# Altium PCB pcb.PcbDoc
Units mil, origin at the board's own origin, x right, y up, seen from the top; angles counter-clockwise.
Board outline 1377.95 x 1377.95 mil, 2 copper layers (Top Layer, Bottom Layer); 19 components, 13 nets, 50 pads, 35 vias.
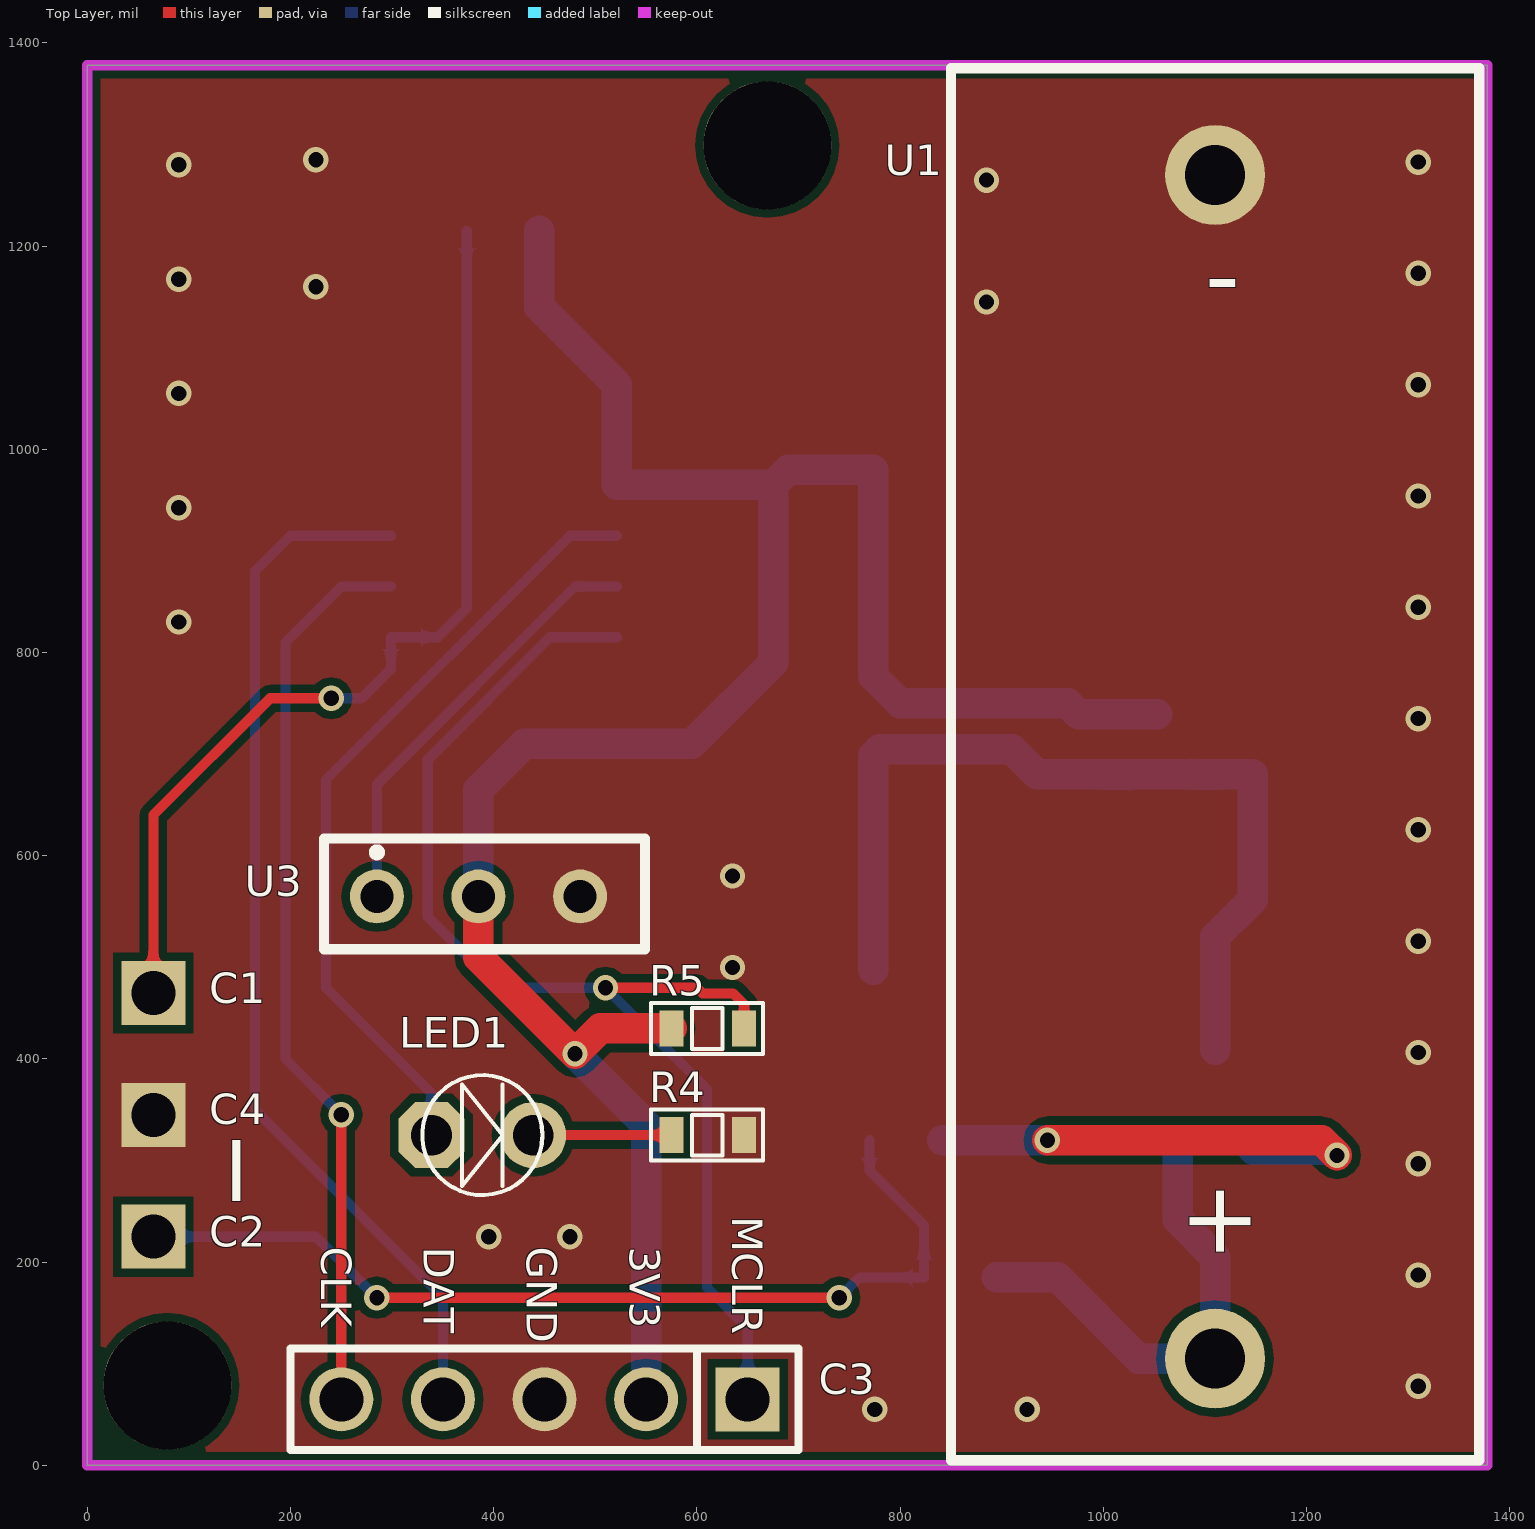
[diagram p0: Top Layer view]
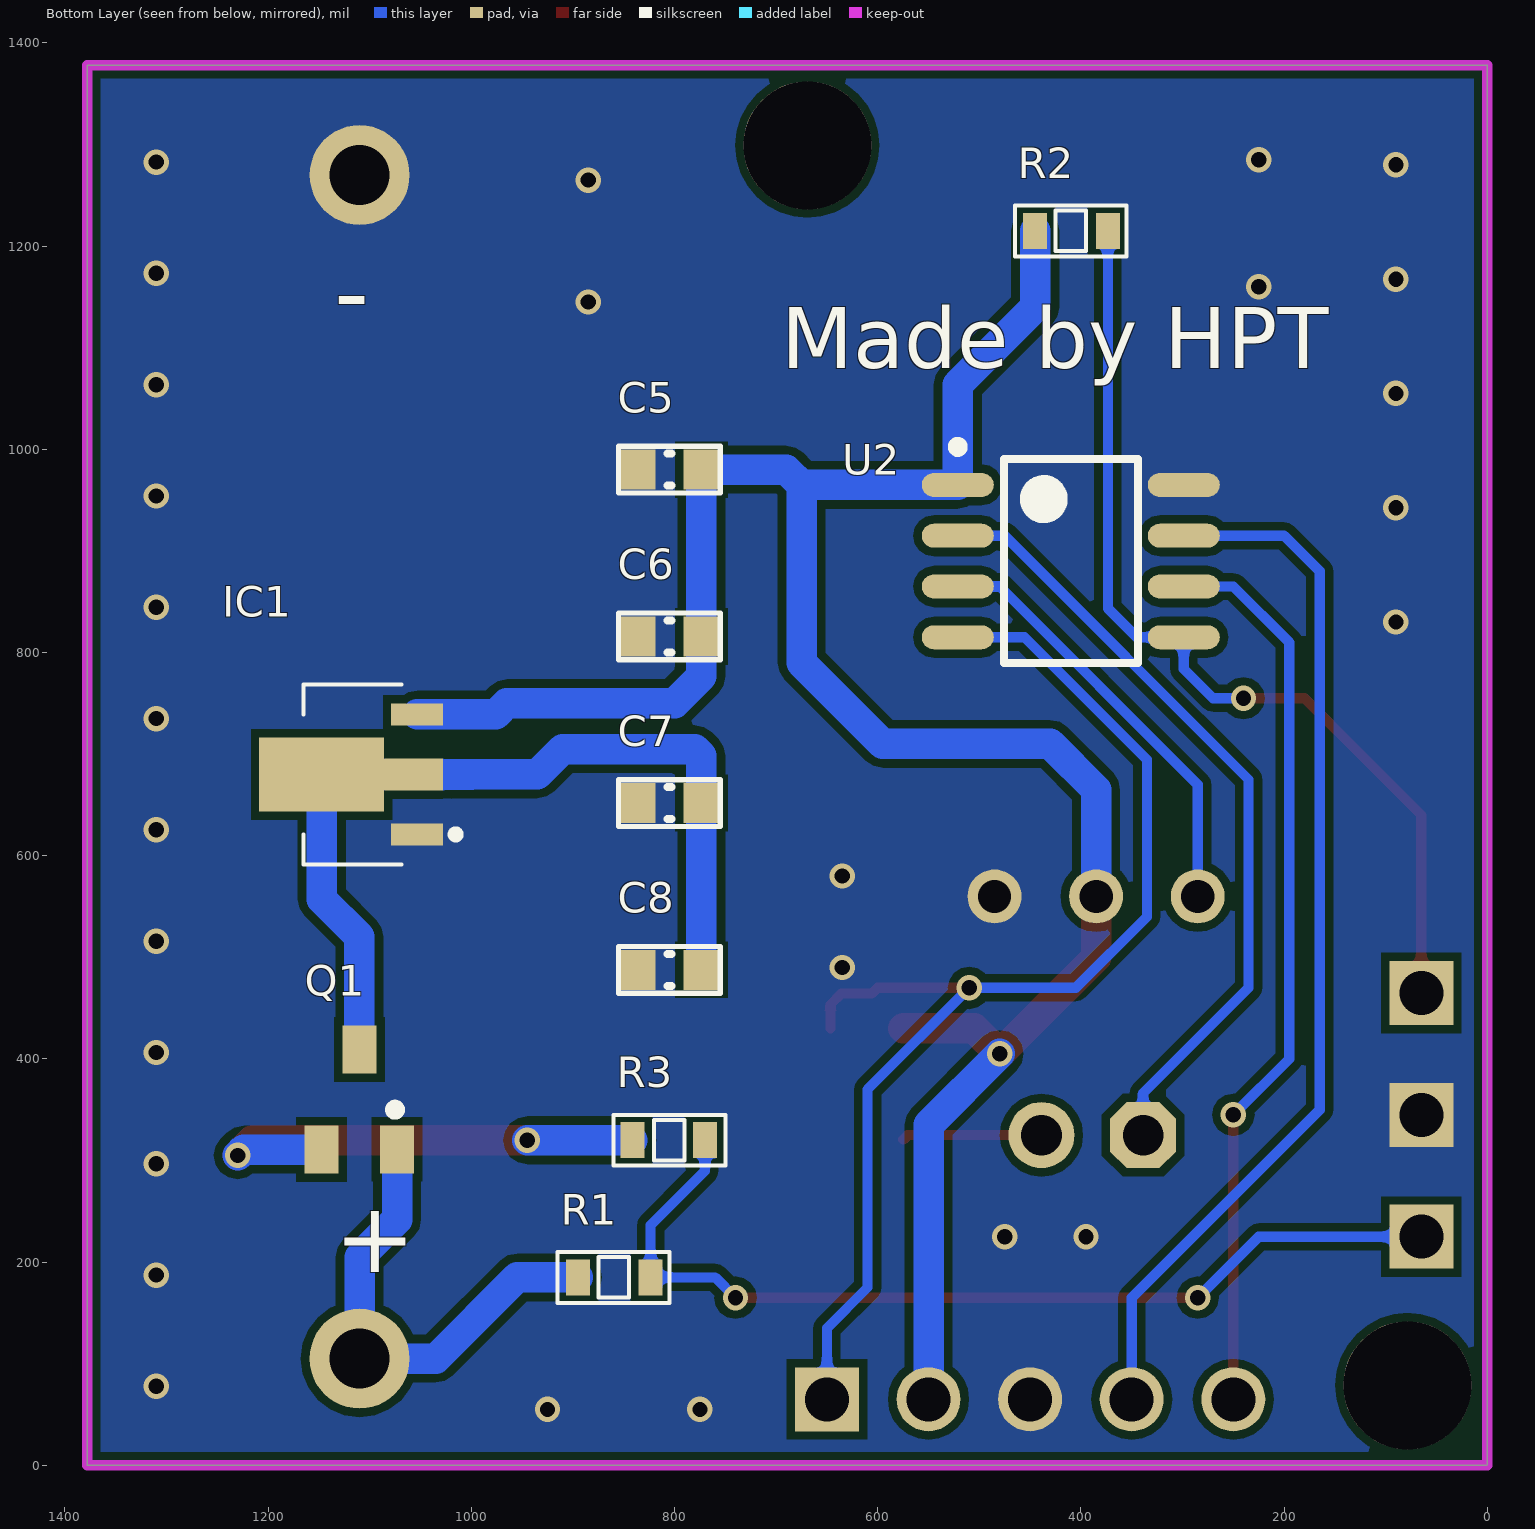
[diagram p1: Bottom Layer view, seen from below]
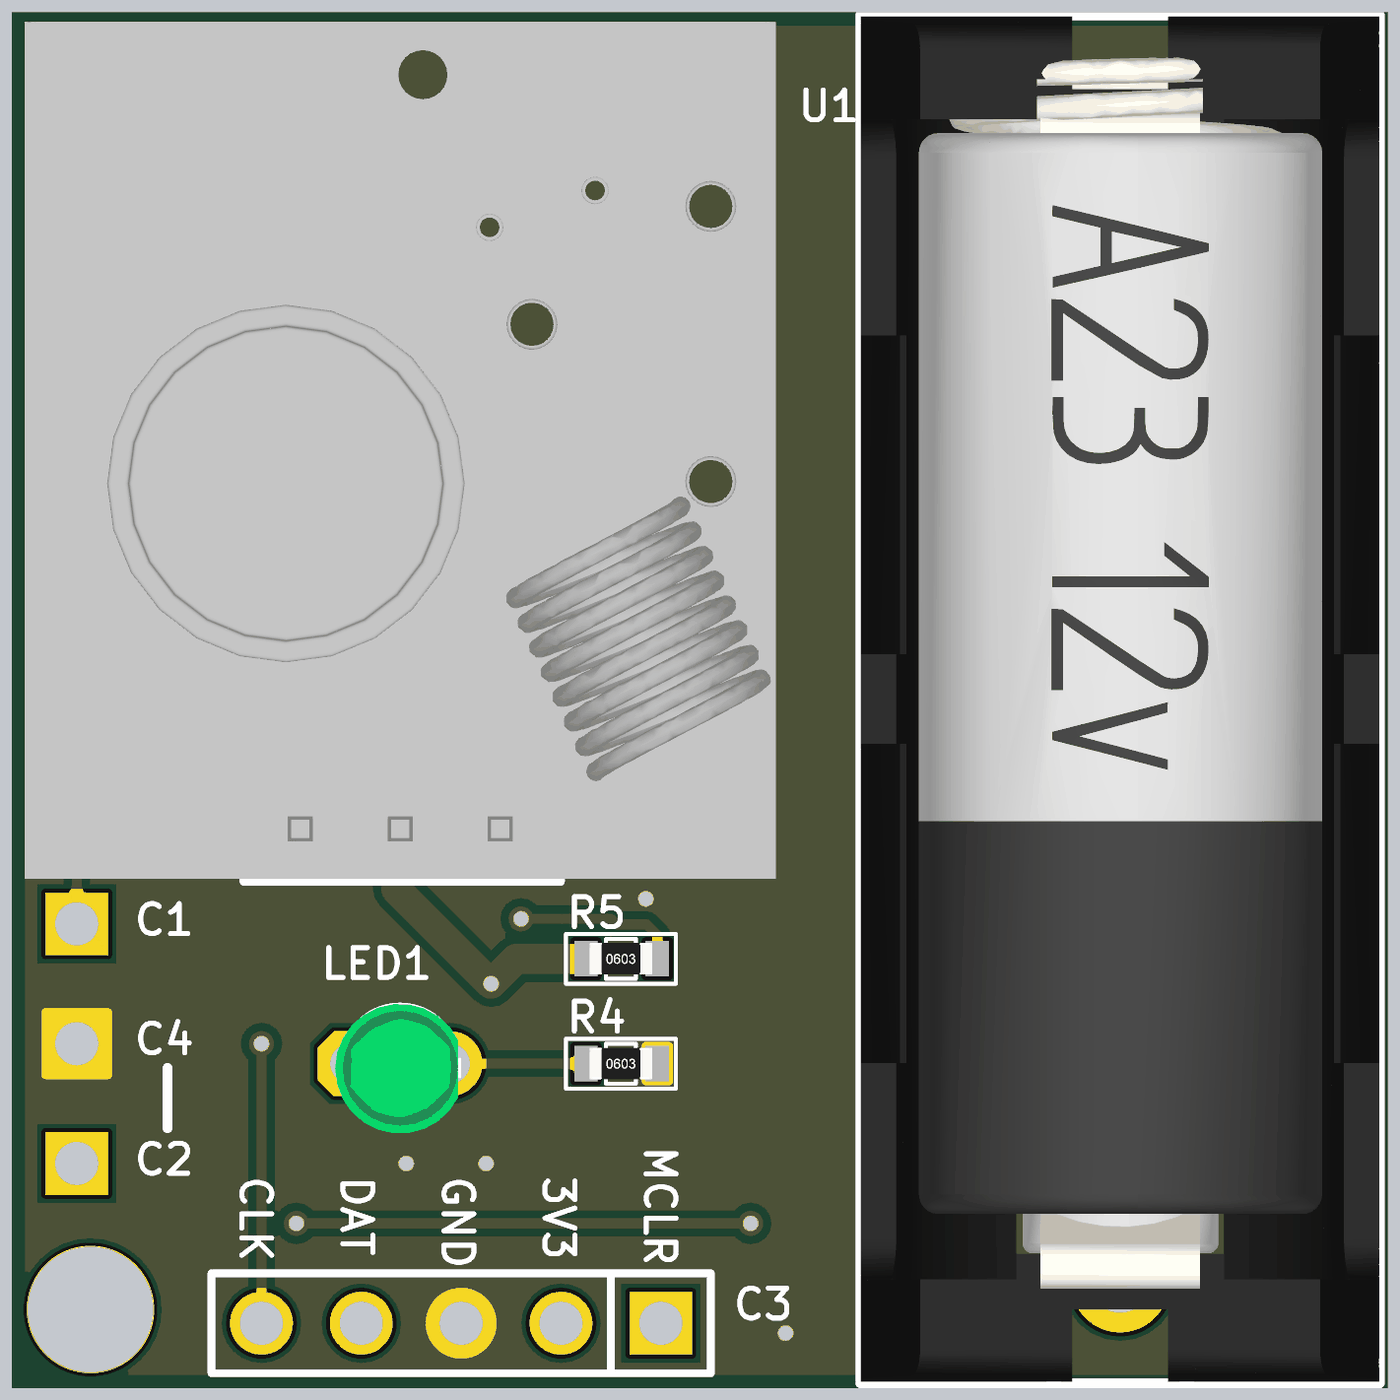
[diagram p2: 3D render of the assembled board from above, using the file's embedded part models]
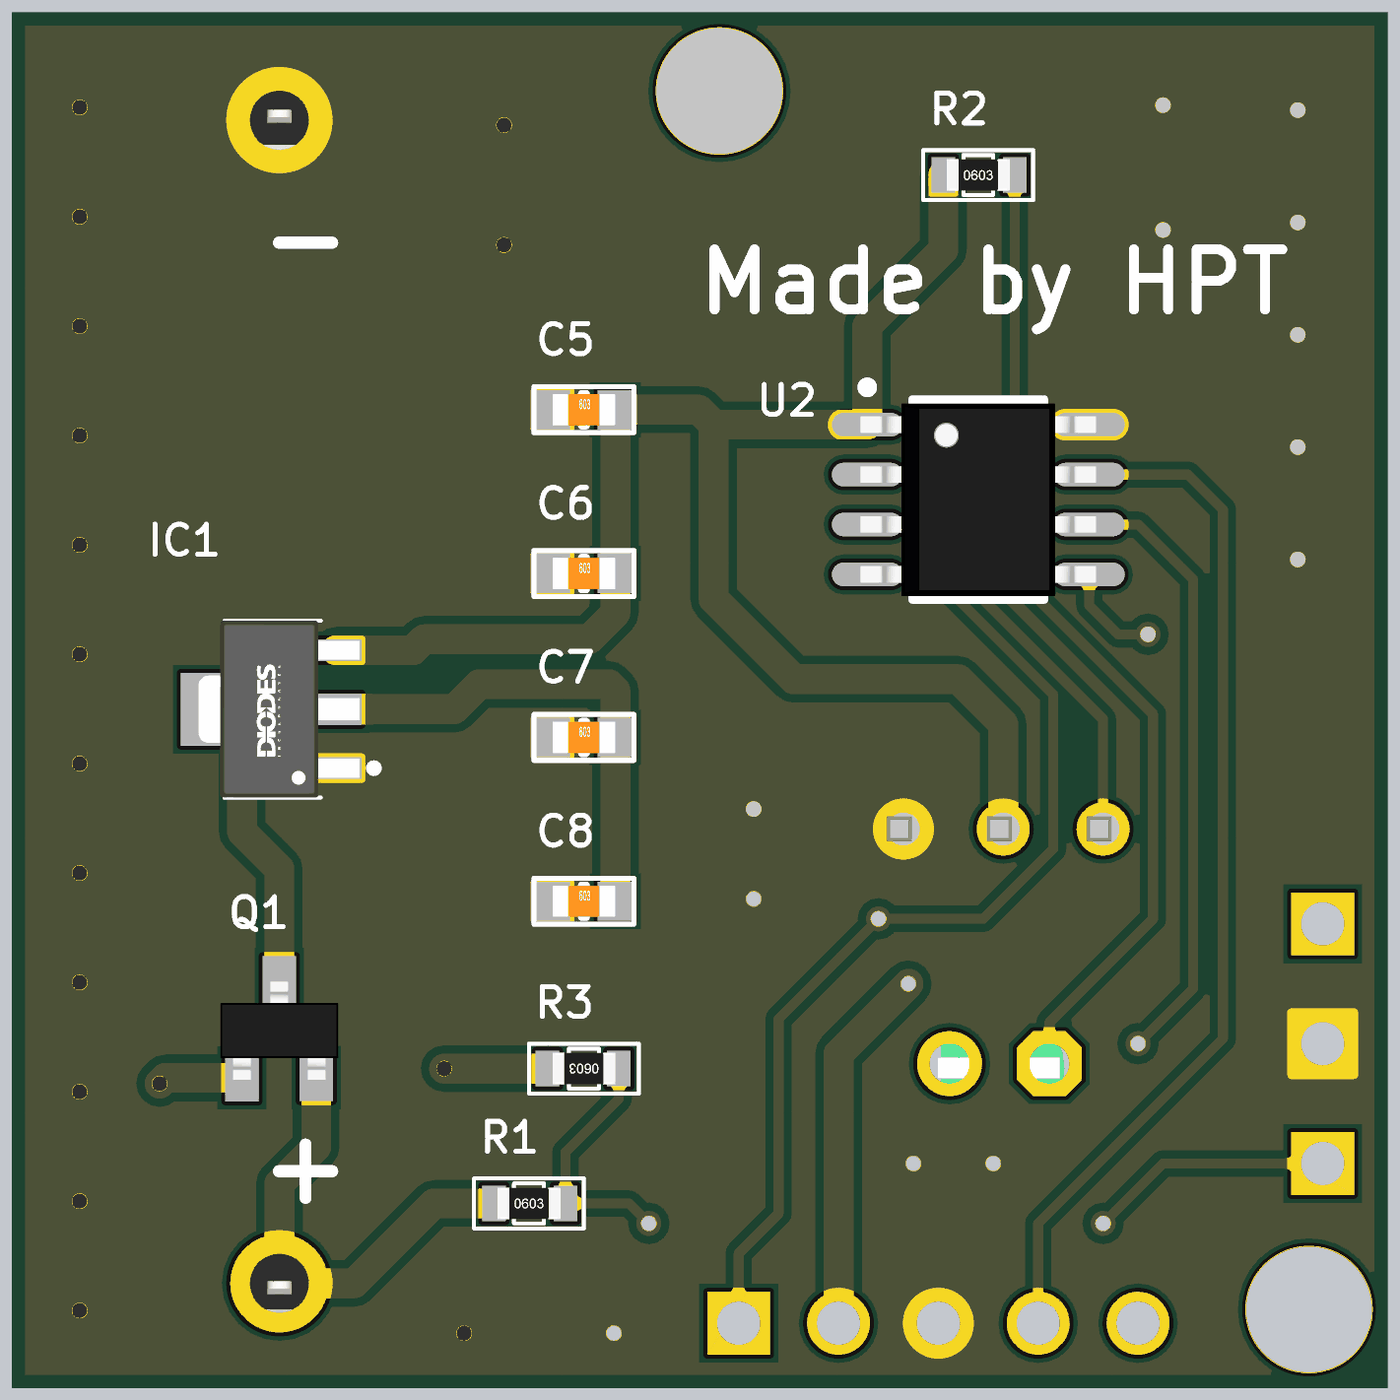
[diagram p3: 3D render of the assembled board from below, using the file's embedded part models]

## Layer stack, top to bottom
Top Solder: solder mask 0.4, Solder Resist, Dk 3.5
Top Layer: signal copper 1.4
Dielectric 1: dielectric 12.6, FR-4, Dk 4.8
Bottom Layer: signal copper 1.4
Bottom Solder: solder mask 0.4, Solder Resist, Dk 3.5

## Board outline
0,0 0,1377.95 1377.95,1377.95 1377.95,0

## Design rules (kind name [scope] priority, off if disabled: settings)
Clearance [All] p1: gap=8
HoleSize [All] p1: absolutevalues=TRUE maxlimit=150 minlimit=1 maxpercent=80.000 minpercent=20.000
MinimumSolderMaskSliver [All] p1: minsoldermaskwidth=0
PlaneConnect [All] p1: planeconnectstyle=Direct reliefexpansion=20 reliefentries=4 reliefconductorwidth=10 reliefairgap=10
PolygonConnect [All] p1: connectstyle=Direct reliefconductorwidth=10 reliefentries=4 polygonreliefangle="90 Angle" airgapwidth=10
RoutingVias [All] p1: holewidth=15 width=25 viastyle="Through Hole" minholewidth=15 minwidth=25 maxholewidth=28 maxwidth=50
SilkToSilkClearance [All] p1: silktosilkclearance=0
SilkToSolderMaskClearance [IsPad] p1: minsilkscreentomaskgap=0 clearancetoexposedcopper=TRUE
SolderMaskExpansion [All] p1: expansion=4
Width [All] p1: maxlimit=50 minlimit=8 preferedwidth=10
25 further rules are at their usual default settings.

## Components (designator, comment, footprint, x,y, rotation, side; value= is the part's Value field where it differs from the comment)
C1 "JP1" JP1-D1T 65,465 r0 top
C2 "JP1" JP1-D1T 65,225 r0 top
C3 "JP5" JP5-D1T 650,65 r180 top
C4 "JP1" JP1-D1T 65,345 r0 top
C5 "100nF" CN-SMD-0603 805,980 r180 bottom
C6 "100nF" CN-SMD-0603 805,815.89 r180 bottom
C7 "100nF" CN-SMD-0603 805,651.77 r180 bottom
C8 "100nF" CN-SMD-0603 805,487.66 r180 bottom
IC1 "HT7133-3" AZ1117CR33TRG1 1165,680 r90 bottom
LED1 "LED" LED-3MM-GREEN 338.82,325 r0 top
Q1 "A1015" SOT23B 1110.12,360 r180 bottom
R1 "1M" RES-SMD-0603 860,185 r180 bottom
R2 "1M" RES-SMD-0603 410,1215 r180 bottom
R3 "1K" RES-SMD-0603 805,320 r0 bottom
R4 "10K" RES-SMD-0603 610,325 r0 top
R5 "10K" RES-SMD-0603 610,430 r0 top
U1 "Pin 12V" pin_alkaline 1175,350 r90 top
U2 "PIC12F683" SO8 410,890 r180 bottom
U3 "FS1000A" fs1000a 385,560 r0 top

## Footprints (in the part's own frame and the unit in brackets; to place one, negate y for a bottom-side part, rotate by r counter-clockwise, add the part's x,y. Pads: shape width x height; smd on the part's side, far side on the other; paste and mask are expansions set on the pad)
AZ1117CR33TRG1 [mm]
  rect 0.55x1.3 smd: 1(-1.5,-2.838) 3(1.5,-2.838)
  rect 0.8x1.475 smd: 2(0,-2.75)
  rect 1.85x3.125 smd: 4(0,-0.45)
  silkscreen extent -2.25,-3.9 2.25,0, body extent -2.25,-3.44 2.25,0.66, height 1.6
CN-SMD-0603 [mm]
  rect 0.9x1 smd: 1(-0.8,0) 2(0.8,0)
  silkscreen extent -1.27,-0.58 1.27,0.58, body extent -0.8,-0.4 0.8,0.4, height 0.3
fs1000a [mm]
  round 1.349 hole 0.83: 1(-2.54,0) 2(0,0) 3(2.54,0)
  silkscreen extent -3.86,-1.32 4.17,1.45, body extent -9.46,-1.27 9.65,20.54, height 10.34
JP1-D1T [mm] "1pins, 1 row, straight, gold plating"
  rect 1.6x1.6 hole 1.1: 1(0,0)
JP5-D1T [mm] "5 pins, 1 row, straight, gold plating"
  rect 1.6x1.6 hole 1.1: 1(0,0)
  round 1.6 hole 1.1: 2(2.54,0) 3(5.08,0) 4(7.62,0) 5(10.16,0)
  silkscreen extent -1.27,-1.27 11.43,1.27
LED-3MM-GREEN [mil]
  oct 65x65 hole 40: 1(0,0)
  round 65 hole 40: 2(100,0)
  silkscreen extent -9,-59 109,59, body extent -15,-70 112,60, height 182
pin_alkaline [mm]
  round 2.5 hole 1.5: 1(-6.223,1.651) 2(23.368,1.651)
  silkscreen extent -8.76,-4.95 26.04,8.26, body extent -8.73,-4.95 26,8.25, height 11.03
RES-SMD-0603 [mm]
  rect 0.6x0.9 smd: 1(-0.889,0) 2(0.927,0)
  silkscreen extent -1.4,-0.64 1.4,0.64, body extent -0.8,-0.4 0.8,0.4, height 0.43
SO8 [mm] "SOIC, 8-Leads, Body 4.9x3.9mm, Pitch 1.27mm, IPC High Density"
  oval 1.8x0.6 smd: 1(-2.825,1.905) 2(-2.825,0.635) 3(-2.825,-0.635) 4(-2.825,-1.905) 5(2.825,-1.905) 6(2.825,-0.635) 7(2.825,0.635) 8(2.825,1.905)
  silkscreen extent -2.95,-2.55 1.68,2.98, body extent -2.99,-2.45 3,2.45, height 1.6
SOT23B [mm] "SOT 23B"
  rect 0.85x1.2 smd: 1(0.94,-1.245) 2(0,1.25) 3(-0.95,-1.25)
  silkscreen extent 0.77,-0.38 1.02,-0.13, body extent -1.5,-1.3 1.5,1.2, height 1.06

## Part data
C1 C2 C3 C4: "WR-PHD 2.54 mm Angled Socket Header"
C5 C6 C7 C8: library part CN
IC1: library part AP2204RA-5.0TRG1, "Integrated Circuit"
LED1: "LED Single colour Green and Red"
Q1: "PNP 600mW, ECB"
R1 R2 R3 R4 R5: library part Res-SMD, "Resistor"
U1: library part "Pin Alkaline 12V"

## Free pads (board coordinates)
  round 125.98 hole 125.98: 2(78.74,78.74) 2(669.29,1299.21)

## Via types
v1: diameter 25, hole 15, Top Layer to Bottom Layer, tented both sides, 35 vias

## Nets (pads, with @x,y where several pads share a name; then routed paths per layer and width w, separated by ;. In a path a pad name is that pad's centre, name@x,y a point inside that pad or via, vN(x,y) a via of type N, cw(c..) or ccw(c..) an arc to the next point about the centre after c; other vN are vias at no path point)
3V3: C3.2 C5.2 C6.2 IC1.3 R2.1 R5.1 U2.1 U3.2 | length 2329.3
  Top Layer w30: U3.2 385,500 v1(480,405) 505,430 R5.1
  Bottom Layer w30: U3.2 385,665 430,710 595,710 675,790 675,965 ; R2.1 445,1140 521.22,1063.78 U2.1 675,965 ; v1(480,405) 550,335 C3.2 ; IC1.3 975.94,739.06 965,750 800,750 773.5,776.5 C6.2 C5.2 690,980 675,965
12V: C7.2 C8.2 IC1.2 IC1.4 Q1.2 | length 883.9
  Bottom Layer w30: C8.2 C7.2 773.5,698.5 780,705 910,705 935,680 IC1.2 IC1.4 1147.28,557.28 1110.12,520.12 Q1.2
GND: C3.3 C4.1 C5.1 C6.1 C7.1 C8.1 IC1.1 R4.2 U1.2 U2.8 U3.3
  other v1: 775,55 925,55 1310,77.73 1310,187.27 395,225 475,225 1310,296.82 1310,406.36 635,490 1310,515.91 635,580 1310,625.45 1310,735 90,830 1310,844.55 90,942.5 1310,954.09 90,1055 1310,1063.64 885,1145 225,1160 90,1167.5 1310,1173.18 885,1265 90,1280 1310,1282.73 225,1285
ICSPCLK: C3.5 U2.6 | length 894.3
  Top Layer w10: C3.5 v1(250,345)
  Bottom Layer w10: v1(250,345) 195,400 195,810 250,865 U2.6
ICSPDAT: C3.4 U2.7 | length 1039.9
  Bottom Layer w10: U2.7 200,915 165,880 165,350 350,165 C3.4
MCLR: C3.1 R5.2 U2.4 | length 1224.5
  Top Layer w10: v1(510,470) 600,470 605.5,464.5 635.5,464.5 646.49,453.51 R5.2
  Bottom Layer w10: U2.4 455.46,815 335,694.54 335,540 405,470 v1(510,470) 610,370 610,175 650,135 C3.1
NetC1_1: C1.1 R2.2 U2.5 | length 957.6
  Top Layer w10: C1.1 65,640 180,755 v1(240,755)
  Bottom Layer w10: v1(240,755) 270,755 298.78,783.78 U2.5 345,815 373.51,843.51 R2.2
NetC2_1: C2.1 R1.2 R3.1 | length 948.8
  Top Layer w10: v1(285,165) v1(740,165)
  Bottom Layer w10: C2.1 225,225 v1(285,165) ; v1(740,165) 760,185 R1.2 823.51,236.49 770,290 R3.1
NetLED1_1: LED1.1 U2.2 | length 778.6
  Bottom Layer w10: LED1.1 338.82,366.18 235,470 235,675 475,915 U2.2
NetLED1_2: LED1.2 R4.1 | length 138
  Top Layer w10: LED1.2 570.57,325 R4.1@575,320.57
NetQ1_3: Q1.3 R3.2 | length 479.6
  Top Layer w30: v1(945,320) 1215,320 v1(1230,305)
  Bottom Layer w30: R3.2 v1(945,320) ; Q1.3 1224.21,310.79 v1(1230,305)
RF: U2.3 U3.1 | length 427
  Bottom Layer w10: U3.1 285,670 480,865 U2.3
V_BAT: Q1.1 R1.1 U1.1 | length 469.4
  Bottom Layer w30: R1.1 955,185 1035,105 U1.1 1110,205 1073.12,241.88 Q1.1

## Polygon pours and split planes (outlines as drawn)
GND on Bottom Layer "Bottom Layer-No Net" (solid, pour order 0): 0,1377.95 0,0 1377.95,0 1377.95,1377.95
GND on Top Layer "Bottom Layer-No Net" (solid, pour order 2): 0,1377.95 0,0 1377.95,0 1377.95,1377.95

## Keep-outs
Keep-Out Layer:
  the board outline again, w10

## Silkscreen, mask and mechanical layers (free items; w line width, h text height)
Top Overlay:
  text "I" at 135,260 h60
  text "MCLR" at 635,245 h30 r270
  text "CLK" at 230,215.01 h30 r270
  text "DAT" at 331.25,215.01 h30 r270
  text "GND" at 432.5,215.01 h30 r270
  text "3V3" at 533.75,215.01 h30 r270
Bottom Overlay:
  text "-" at 1135,1120 h70
  text "Made by HPT" at 695,1080 h60
  text "+" at 1135,190 h70

## Text inside footprints (layer, text, board x,y; h text height)
U1: Top Overlay "+" at 1145,200 h70 r90; Top Overlay "-" at 1135,1190 h70 r180